# Altium PCB PD_v3.PcbDoc
Units mil, origin at the board's own origin, x right, y up, seen from the top; angles counter-clockwise.
Board outline 3519.8 x 1510 mil, 2 copper layers (Top Layer, Bottom Layer); 50 components, 35 nets, 142 pads, 321 vias.
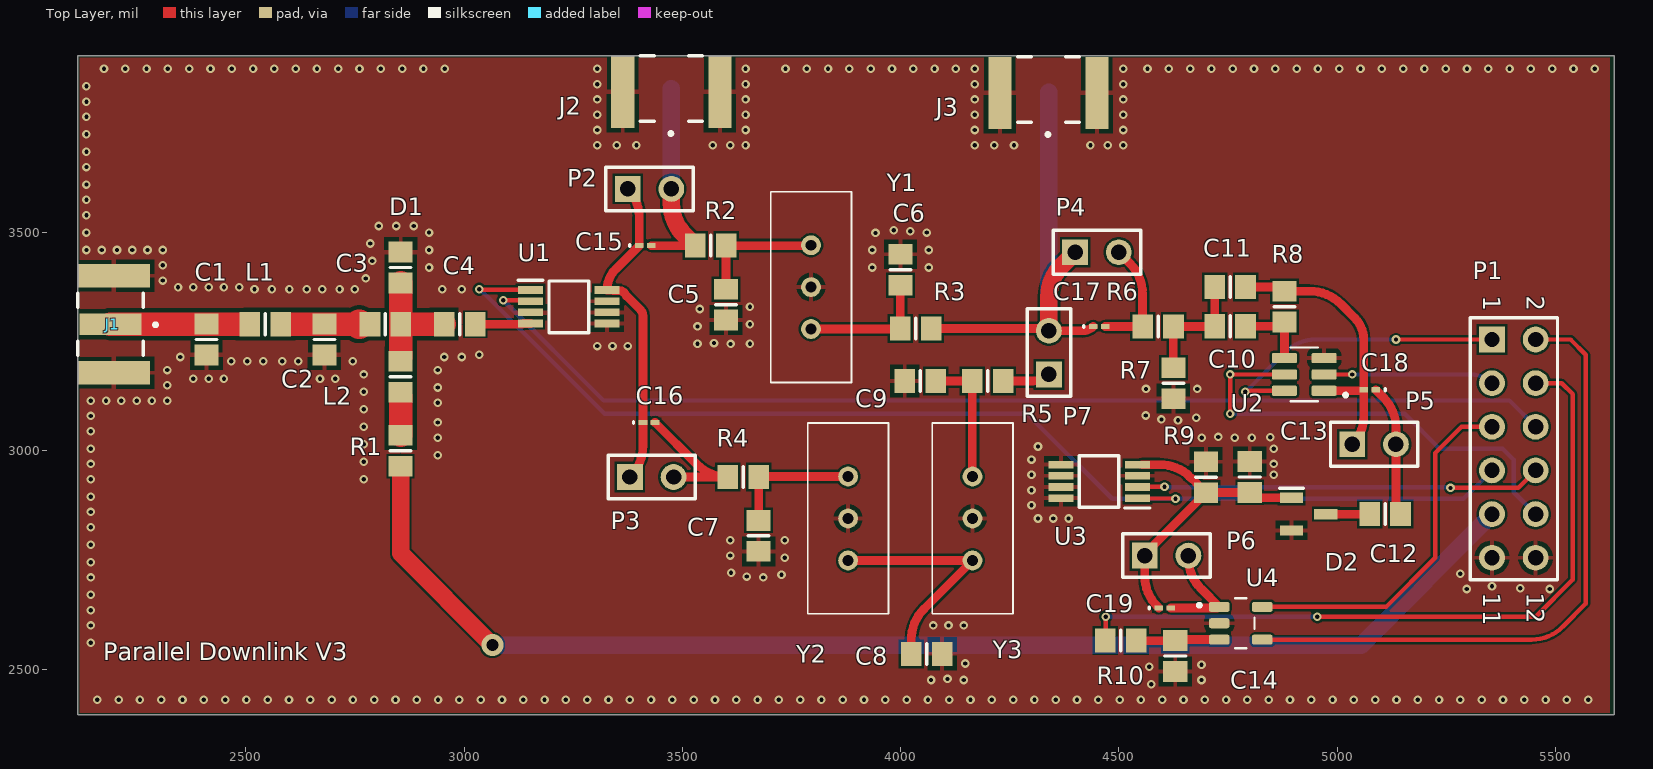
[diagram p0: Top Layer view]
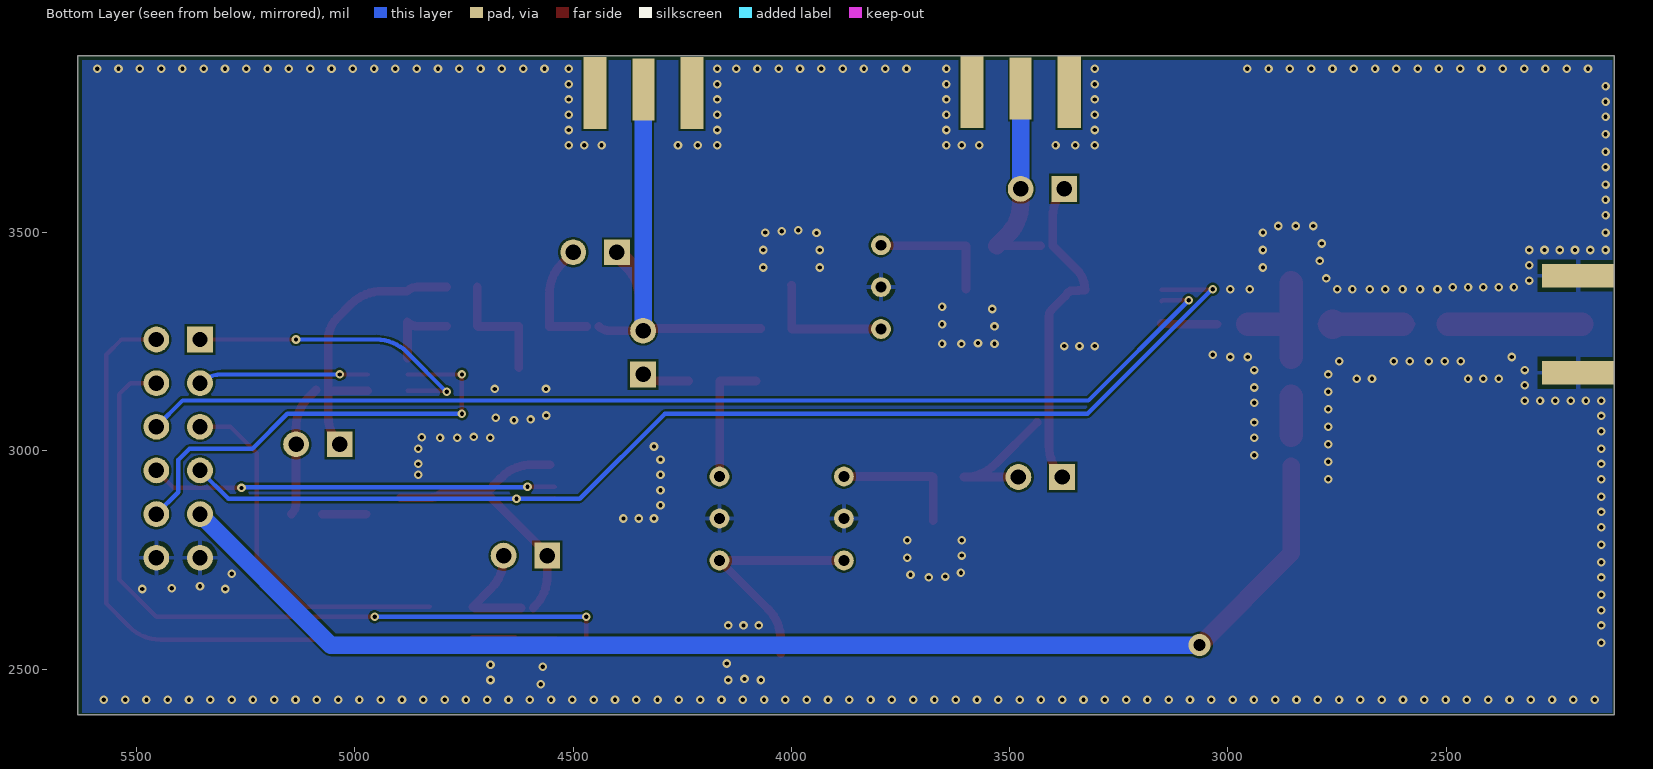
[diagram p1: Bottom Layer view, seen from below]

## Layer stack, top to bottom
Top Solder: solder mask 0.4, Solder Resist, Dk 3.5
Top Layer: signal copper 1.4
Dielectric 1: dielectric 12.6, FR-4, Dk 4.8
Bottom Layer: signal copper 1.4
Bottom Solder: solder mask 0.4, Solder Resist, Dk 3.5

## Board outline
2115.2,3486.85 2115.2,3905 5635,3905 5635,2395 2115.2,2395

## Design rules (kind name [scope] priority, off if disabled: settings)
Clearance Clearance_BD [InNetClass('BD')] p1: gap=5 ignorepadtopadclearanceinfootprint=TRUE except(0: Arc-Hole Track-Hole SMDPad-Hole THPad-Hole Via-Hole Fill-Hole Poly-Hole Region-Hole Text-Hole; 10: Arc-Fill Arc-Poly Arc-Region Track-Fill Track-Poly Track-Region SMDPad-Fill SMDPad-Poly SMDPad-Region THPad-Fill THPad-Poly THPad-Region Via-Fill Via-Poly Via-Region Fill-Fill Fill-Poly Fill-Region Poly-Poly Poly-Region Region-Region)
Clearance Clearance_1 [All] p2: gap=5 ignorepadtopadclearanceinfootprint=TRUE except(0: Arc-Hole Track-Hole SMDPad-Hole THPad-Hole Via-Hole Fill-Hole Poly-Hole Region-Hole Text-Hole)
HoleToHoleClearance [All] p1: gap=5 allowstackedmicrovias=TRUE
MinimumSolderMaskSliver [All] p1: minsoldermaskwidth=5
PolygonConnect [All] p1: thpad.connectstyle=Relief thpad.reliefconductorwidth=10 thpad.reliefentries=4 thpad.polygonreliefangle="90 Angle" thpad.airgapwidth=10 smdpad.connectstyle=Relief smdpad.reliefconductorwidth=10 smdpad.reliefentries=4 smdpad.polygonreliefangle="90 Angle" smdpad.airgapwidth=10 via.connectstyle=Direct via.reliefconductorwidth=10 via.reliefentries=4 via.polygonreliefangle="90 Angle" via.airgapwidth=10
RoutingVias [All] p1: holewidth=9.84 width=19.68 viastyle="Through Hole" minholewidth=9.84 minwidth=19.68 maxholewidth=28 maxwidth=50
SilkToSilkClearance [All] p1: silktosilkclearance=5
SilkToSolderMaskClearance [IsPad] p1: minsilkscreentomaskgap=5 clearancetoexposedcopper=TRUE
SolderMaskExpansion [All] p1: expansion=4 istentingtop=FALSE
UnRoutedNet [All] p1: checkbadconnections=TRUE
Width [All] p1: maxlimit=70 minlimit=10 preferedwidth=10 minimp=50.000000 maximp=50.000000 favimp=50.000000
25 further rules are at their usual default settings.

## Classes and differential pairs
net class BD: NetC1_2 NetC2_2 NetC3_2 NetL2_2

## Components (designator, comment, footprint, x,y, rotation, side; value= is the part's Value field where it differs from the comment)
C1 "陶瓷电容" 6-0805_N 2410,3255 r90 top value=5.6pF
C2 "陶瓷电容" 6-0805_N 2680,3255 r90 top value=4.97pF
C3 "陶瓷电容" 6-0805_N 2820,3290 r0 top value=40pF
C4 "陶瓷电容" 6-0805_N 2990,3290 r0 top value=1pF
C5 "陶瓷电容" 6-0805_N 3600,3335 r90 top value=4.97pF
C6 "陶瓷电容" 6-0805_N 4000,3415 r270 top value=4.97pF
C7 "陶瓷电容" 6-0805_N 3675,2805 r90 top value=4.97pF
C8 "陶瓷电容" 6-0805_N 4060,2535 r180 top value=4.97pF
C9 "陶瓷电容" 6-0805_N 4045,3160 r0 top value=4.97pF
C10 "陶瓷电容" 6-0805_N 4755,3285.43 r0 top value=200nF
C11 "陶瓷电容" 6-0805_N 4755,3375.43 r0 top value=200nF
C12 "陶瓷电容" 6-0805_N 5110,2855 r0 top value=200nF
C13 "陶瓷电容" 6-0805_N 4800,2940 r90 top value=200nF
C14 "陶瓷电容" 6-0805_N 4629.41,2530 r270 top value=200nF
C15 "陶瓷电容" 0603 3415,3470 r0 top value=40pF
C16 "陶瓷电容" 0603 3423.78,3065 r0 top value=40pF
C17 "陶瓷电容" 0603 4455,3285 r0 top value=40pF
C18 "陶瓷电容" 0603 5075,3140 r180 top value=40pF
C19 "陶瓷电容" 0603 4605.63,2640 r0 top value=40pF
D1 "陶瓷电容" 6-0805_N 2855,3420 r270 top
D2 "SMS7621-005LF" SOT95P237X112-3N 4935,2855 r0 top
J1 "SMA-J-P-H-ST-EM1" SAMTEC_SMA-J-P-H-ST-EM1#1 2190,3290 r270 top
J2 "SMA-J-P-H-ST-EM1" SAMTEC_SMA-J-P-H-ST-EM1#2 3475,3830 r180 top (schematic designator J1)
J3 "SMA-J-P-H-ST-EM1" SAMTEC_SMA-J-P-H-ST-EM1#2 4338.78,3827.87 r180 top (schematic designator J1)
L1 "Inductor" 6-0805_N 2545,3290 r0 top value=1.37nH
L2 "Inductor" 6-0805_N 2855,3170 r270 top value=1.0nH
P1 "Header 6X2" HDR2X6 5355,3255 r270 top
P2 "Header 2" HDR1X2 3375,3600 r0 top
P3 "Header 2" HDR1X2 3380,2940 r0 top
P4 "Header 2" HDR1X2 4400,3455 r0 top
P5 "Header 2" HDR1X2 5035,3015 r0 top
P6 "Header 2" HDR1X2 4559.41,2760 r0 top
P7 "Header 2" HDR1X2 4340,3175 r90 top
R1 "电阻" 6-0805_N 2855,3000 r90 top value=15k
R2 "电阻" 6-0805_N 3565,3470 r180 top value=15k
R3 "电阻" 6-0805_N 4035,3280 r180 top value=15k
R4 "电阻" 6-0805_N 3640,2940 r180 top value=15k
R5 "电阻" 6-0805_N 4200,3160 r180 top value=15k
R6 "电阻" 6-0805_N 4590,3285 r0 top value=15k
R7 "电阻" 6-0805_N 4625,3155 r90 top value=15k
R8 "电阻" 6-0805_N 4880,3330.43 r90 top value=15k
R9 "电阻" 6-0805_N 4700,2939.57 r270 top value=15k
R10 "电阻" 6-0805_N 4504.41,2565 r180 top value=15k
U1 "ADG901BRMZ" SOP65P490X110-8N 3240,3330 r0 top
U2 "LMH6611MK" SOT95P280X110-6N 4925,3175 r180 top
U3 "ADG901BRMZ" SOP65P490X110-8N 4455,2930 r180 top
U4 "LMV331M5" SOT95P280X145-5N 4779.41,2605 r0 top
Y1 "ECS-10.7-7.5A" ECS10775A 3795,3471.06 r270 top
Y2 "ECS-10.7-7.5A" ECS10775A 3880,2941.06 r270 top
Y3 "ECS-10.7-7.5A" ECS10775A 4165,2748.94 r90 top

## Footprints (in the part's own frame and the unit in brackets; to place one, negate y for a bottom-side part, rotate by r counter-clockwise, add the part's x,y. Pads: shape width x height; smd on the part's side, far side on the other; paste and mask are expansions set on the pad)
6-0805_N [mm] "Chip Resistor, Body 2.0x1.2mm, IPC Medium Density"
  rect 1.2x1.4 smd: 1(-0.9,0) 2(0.9,0)
  silkscreen extent 0,-0.6 0,0.6, body extent -1.07,-0.7 1.07,0.7, height 0.7
0603 [mm] "Chip Inductor, Body 0.6x0.3mm, IPC High Density"
  rect 0.5x0.3 smd: 1(-0.35,0) 2(0.35,0)
  silkscreen extent -0.9,-0.05 -0.9,0.05, body extent -0.33,-0.18 0.33,0.18, height 0.55
ECS10775A [mm]
  round 1.155 hole 0.63: 1(0,0) 2(2.44,0) 3(4.88,0)
  silkscreen extent -3.11,-2.35 7.99,2.35, body extent -3.11,-2.35 7.99,2.35, height 11.3
HDR1X2 [mm] "Connector; Header; 2 Position"
  rect 1.5x1.5 hole 0.9: 1(0,0)
  round 1.5 hole 0.9: 2(2.54,0)
  silkscreen extent -1.27,-1.27 3.81,1.27
HDR2X6 [mm] "Connector; Header; 6x2 Position"
  rect 1.5x1.5 hole 0.9: 1(0,0)
  round 1.5 hole 0.9: 2(0,2.54) 3(2.54,0) 4(2.54,2.54) 5(5.08,0) 6(5.08,2.54) 7(7.62,0) 8(7.62,2.54) 9(10.16,0) 10(10.16,2.54) 11(12.7,0) 12(12.7,2.54)
  silkscreen extent -1.27,-1.27 13.97,3.81
SAMTEC_SMA-J-P-H-ST-EM1#1 [mm]
  rect 1.27x3.6 smd: 1(0,0)
  rect 1.35x4.2 smd: 2_1(-2.825,0.2) 3_1(2.825,0.2)
  rect 1.35x4.2 smd far side: 2_2(-2.825,0.2) 3_2(2.825,0.2)
  silkscreen extent -1.8,-1.9 1.8,2.72
SAMTEC_SMA-J-P-H-ST-EM1#2 [mm]
  rect 1.27x3.6 smd far side: 1(0,0)
  rect 1.35x4.2 smd: 2_1(-2.825,0.2) 3_1(2.825,0.2)
  rect 1.35x4.2 smd far side: 2_2(-2.825,0.2) 3_2(2.825,0.2)
  silkscreen extent -1.8,-1.9 1.8,2.72
SOP65P490X110-8N [mm]
  rect 1.45x0.45 smd: 1(-2.225,0.975) 2(-2.225,0.325) 3(-2.225,-0.325) 4(-2.225,-0.975) 5(2.225,-0.975) 6(2.225,-0.325) 7(2.225,0.325) 8(2.225,0.975)
  silkscreen extent -2.95,-1.5 1.15,1.55, body extent -2.45,-1.5 2.45,1.5, height 1.1
SOT95P237X112-3N [mm]
  rect 1.35x0.6 smd: 1(-1,0.95) 2(-1,-0.95) 3(1,0)
  silkscreen extent -1.68,1.5 -0.33,1.5
SOT95P280X110-6N [mm]
  rrect25% 1.45x0.59 smd: 1(-1.155,0.95) 2(-1.155,0) 3(-1.155,-0.95) 4(1.155,-0.95) 5(1.155,0) 6(1.155,0.95)
  silkscreen extent -2.5,-1.57 0.8,1.57, body extent -1.4,-1.45 1.4,1.45, height 1.1
SOT95P280X145-5N [mm]
  rrect50% 1.21x0.59 smd: 1(-1.255,0.95) 2(-1.255,0) 3(-1.255,-0.95) 4(1.255,-0.95) 5(1.255,0.95)
  silkscreen extent -2.51,-1.45 0.8,1.45, body extent -1.4,-1.45 1.4,1.45, height 1.45

## Part data
C1 C2 C3 C4 C5 C6 C7 C8 C9 C10 C11 C12 C13 C14 C15 C16 C17 C18 C19 D1: "Capacitor (Semiconductor SIM Model)", LatestRevisionDate=29-May-2009, LatestRevisionNote="IPC-7351 Footprint Added.", PackageDescription="Chip Capacitor", PackageReference=C1206, Published=8-Jun-2000, Publisher="Altium Limited"
D2: "Schottky Diode", Manufacturer_Name=Skyworks, Mouser Part Number=873-SMS7621-005LF, Datasheet Link=http://www.skyworksinc.com/uploads/documents/Surface_Mount_Schottky_Diodes_200041AD.pdf, Height=1.12mm, Manufacturer_Part_Number=SMS7621-005LF, Mouser Price/Stock=https://www.mouser.co.uk/ProductDetail/Skyworks-Solutions-Inc/SMS7621-005LF?qs=WMHGlxXAKT%252Bjr6kEDDbbkQ%3D%3D
J1 J2 J3: "SMA Connector Jack, Female Socket 50Ohm Board Edge, End Launch Solder", Package=None, Digi-Key_Part_Number=SAM8857-ND, MF=Samtec, MP=SMA-J-P-H-ST-EM1, SnapEDA_Link=https://www.snapeda.com/parts/SMA-J-P-H-ST-EM1/Samtec%20Inc./view-part/134500/?ref=snap, Toby_UK-Purchase-URL=https://snapeda.com/shop?store=Toby+UK&id=134500
P1: "Header, 6-Pin, Dual row", LatestRevisionDate=17-Jul-2002, LatestRevisionNote="Re-released for DXP Platform.", Publisher="Altium Limited"
P2 P3 P4 P5 P6 P7: "Header, 2-Pin", LatestRevisionDate=17-Jul-2002, LatestRevisionNote="Re-released for DXP Platform.", Publisher="Altium Limited"
R1 R2 R3 R4 R5 R6 R7 R8 R9 R10: "Resistor", LatestRevisionDate=29-May-2009, LatestRevisionNote="IPC-7351 Footprint Added.", PackageDescription="Chip Resistor", PackageReference=J1-0603, Published=8-Jun-2000, Publisher="Altium Limited"
U1 U3: "RF Switch, Wideband, 40 dB Isolation at 1 GHz, CMOS 1.65 V to 2.75 V, SPST Switches, RM-8, Pb-Free, 50 Tube", Off Isolation Test Freq=1G, Supply Voltage="Single (+1.65V to +2.75V)", # Sw Functions=1, Bandwidth=4.5GHz, Code_JEDEC=MO-187-AA, ComponentLink1Description="Manufacturer URL", ComponentLink1URL=www.analog.com, ComponentLink2Description=Datasheet, ComponentLink2URL=http://www.analog.com/static/imported-files/data_sheets/ADG901_902.pdf, ComponentLink3Description="Package Specification", ComponentLink3URL=http://www.analog.com/static/imported-files/packages/PKG_PDF/MSOP%28RM%29/RM_8.pdf, Configuration=SPST/NO, DatasheetVersion=RevB, Insertion Loss (dB)=800mdB, Off Isolation=37dB, P-1dB (dBm)=17, PackageDescription="8-Lead Mini Small Outline Package [MSOP]", PackageReference=RM-8, PackageVersion=Aug-2005
U2 U4: Package=None, Availability=Unavailable, MF="{'manufacturer': u'Texas Instruments'}", Price=None
  U2: MP=LMH6611MK/NOPB
  U4: MP=LMV331M5/NOPB
Y1 Y2 Y3: "Crystal or Oscillator", Manufacturer_Name=ECS, Mouser Part Number=520-107-7.5A, Arrow Part Number=ECS-10.7-7.5A, Arrow Price/Stock=https://www.arrow.com/en/products/ecs-10.7-7.5a/ecs-international, Datasheet Link="http://www.ecsxtal.com/store/pdf/mono crystal filters.pdf", Height=11.2mm, Manufacturer_Part_Number=ECS-10.7-7.5A, Mouser Price/Stock=https://www.mouser.co.uk/ProductDetail/ECS/ECS-107-75A?qs=A5Qiz0JZgg4zSHI1UHphaA%3D%3D
L1 L2: Code_IEC=1005, Code_JEITA=0402, LatestRevisionDate=29-May-2009, LatestRevisionNote="IPC-7351 Footprint Added.", PackageDescription="Chip Inductor", PackageReference=0402-A, Published=8-Jun-2000, Publisher="Altium Limited"

## Via types
v1: diameter 19.68, hole 9.84, Top Layer to Bottom Layer, 320 vias
v2: diameter 50, hole 28, Top Layer to Bottom Layer, 1 vias

## Nets (pads, with @x,y where several pads share a name; then routed paths per layer and width w, separated by ;. In a path a pad name is that pad's centre, name@x,y a point inside that pad or via, vN(x,y) a via of type N, cw(c..) or ccw(c..) an arc to the next point about the centre after c; other vN are vias at no path point)
GND: C1.1 C2.1 C5.1 C6.1 C7.1 C8.1 C9.1 C13.2 C14.2 D1.1 D2.2 J1.2_1 J1.2_2 J1.3_1 J1.3_2 J2.2_1 J2.3_1 J3.2_1 J3.3_1 P1.11 P1.12 R7.1 R9.1 U1.3 U1.5 U1.6 U1.7 U2.3 U3.3 U3.5 U3.6 U3.7 U3.8 U4.2 Y1.2 Y2.2 Y3.2
  other v1: 2160,2430 2208.79,2430 2257.58,2430 2306.37,2430 2355.16,2430 2403.95,2430 2452.74,2430 2501.53,2430 2550.32,2430 2599.1,2430 2647.89,2430 2696.68,2430 2745.47,2430 2794.26,2430 2843.05,2430 2891.84,2430 2940.63,2430 2989.42,2430 3038.21,2430 3087,2430 3135.79,2430 3184.58,2430 3233.37,2430 3282.16,2430 3330.95,2430 3379.74,2430 3428.52,2430 3477.31,2430 3526.1,2430 3574.89,2430 3623.68,2430 3672.47,2430 3721.26,2430 3770.05,2430 3818.84,2430 3867.63,2430 3916.42,2430 3965.21,2430 4014,2430 4062.79,2430 4111.58,2430 4160.37,2430 4209.15,2430 4257.94,2430 4306.73,2430 4355.52,2430 4404.31,2430 4453.1,2430 4501.89,2430 4550.68,2430 4599.47,2430 4648.26,2430 4697.05,2430 4745.84,2430 4794.63,2430 4843.42,2430 4892.21,2430 4941,2430 4989.79,2430 5038.57,2430 5087.36,2430 5136.15,2430 5184.94,2430 5233.73,2430 5282.52,2430 5331.31,2430 5380.1,2430 5428.89,2430 5477.68,2430 5526.47,2430 5575.26,2430 4574.47,2465 4070,2475 4145,2475 4689.47,2475 4107.63,2477.45 4569.47,2505 4689.47,2510 4148.13,2512.73 2145,2560 2145,2600 4075,2600 4110,2600 4145,2600 2145,2635 2145,2670 5297.26,2683.38 5487.26,2683.38 5420,2685 5355,2690 2145,2710 3685.61,2709.91 3647.73,2711.87 3727.42,2715.79 5282.26,2718.38 3611.8,2721.02 2145,2745 3735,2755 3610,2760 2145,2785 3610,2795 3735,2795 2145,2825 4315,2845 4350,2845 4385,2845 2145,2860 4300,2875 2145,2895 4300,2910 2145,2935 2770,2935 4300,2945 4855,2945 2145,2970 4855,2970 2770,2975 4300,2980 2940,2990 2145,3005 4855,3005 4315,3010 2770,3015 2940,3030 4690,3030 4765.61,3029.91 4805,3030 4846.8,3031.02 4727.73,3031.87 2145,3045 2770,3055 2940,3065 4635.61,3069.91 4597.73,3071.87 4677.42,3075.79 2145,3080 4561.8,3081.02 2770,3095 2940,3110 2145,3115 2180,3115 2215,3115 2250,3115 2285,3115 2320,3115 2770,3135 4562.45,3141.77 4680.03,3141.77 2940,3145 2320,3150 2380,3165 2415,3165 2450,3165 2670,3165 2705,3165 2770,3175 2320,3185 2940,3185 2466.67,3205 2503.33,3205 2540,3205 2583.33,3205 2620,3205 2745,3205 2350,3215 2955,3215 2995,3215 3035,3220 3305.21,3240 3340.21,3240 3375.21,3240 3535,3245 3610.61,3244.91 3655,3245 3572.73,3246.87 3535,3285 3655,3290 3540,3325 3655,3330 2520,3370 2560,3370 2600,3370 2640,3370 2675,3370 2715,3370 2750,3370 2950,3370 2995,3370 2345,3375 2380,3375 2415,3375 2450,3375 2485,3375 2310,3390 2775,3395 2920,3420 3935,3420 4065,3420 2310,3425 2790,3435 2135,3460 2170,3460 2205,3460 2240,3460 2275,3460 2310,3460 2920,3460 3935,3460 4065,3460 2785,3475 3942.58,3499.21 2135,3500 2920,3500 4060,3500 4022.27,3503.13 3984.39,3505.09 2805,3515 2845,3515 2885,3515 2135,3540 2135,3575 2135,3610 2135,3650 2135,3685 3305,3700 3350,3700 3395,3700 3570,3700 3610,3700 3645,3700 4170,3700 4215,3700 4260,3700 4435,3700 4475,3700 4510,3700 2135,3725 3305,3735 3645,3735 4170,3735 4510,3735 2135,3765 3305,3770 3645,3770 4170,3770 4510,3770 2135,3800 3305,3805 3645,3805 4170,3805 4510,3805 2135,3835 3305,3840 3645,3840 4170,3840 4510,3840 2175.21,3875 2224,3875 2272.79,3875 2321.58,3875 2370.37,3875 2419.16,3875 2467.95,3875 2516.74,3875 2565.53,3875 2614.32,3875 2663.11,3875 2711.9,3875 2760.69,3875 2809.48,3875 2858.27,3875 2907.06,3875 2955.85,3875 3305,3875 3645,3875 3736.48,3875 3785.26,3875 3834.05,3875 3882.84,3875 3931.63,3875 3980.42,3875 4029.21,3875 4078,3875 4126.79,3875 4170,3875 4510,3875 4565.9,3875 4614.68,3875 4663.47,3875 4712.26,3875 4761.05,3875 4809.84,3875 4858.63,3875 4907.42,3875 4956.21,3875 5005,3875 5053.79,3875 5102.58,3875 5151.37,3875 5200.16,3875 5248.95,3875 5297.74,3875 5346.53,3875 5395.32,3875 5444.1,3875 5492.89,3875 5541.68,3875 5590.47,3875
NetC1_2: C1.2 J1.1 L1.1 | length 319.9
  Top Layer w10: C1.2@2409.57,3290 C1.2
  Top Layer w20: C1.2 C1.2@2410.22,3290.22 ; L1.1@2495,3290 L1.1
  Top Layer w54.08: J1.1 C1.2@2409.57,3290 ; C1.2@2410.22,3290.22 2494.78,3290.22 L1.1@2495,3290
NetC2_2: C2.2 C3.1 L1.2 | length 204.5
  Top Layer w20: L1.2 L1.2@2600,3290 ; C2.2@2679.78,3290.22 C2.2 C2.2@2680.22,3290.22 ; 2760,3290 C3.1
  Top Layer w54.08: L1.2@2600,3290 2600.22,3290.22 C2.2@2679.78,3290.22 ; C2.2@2680.22,3290.22 2759.78,3290.22
  Top Layer w67.18: 2759.78,3290.22 2760,3290
NetC3_2: C3.2 C4.1 D1.2 L2.1 | length 269.6
  Top Layer w20: L2.1 L2.1@2855.22,3205.65 ; D1.2 D1.2@2855.22,3384.35 ; C3.2@2855.22,3290.22 C3.2
  Top Layer w54.08: C3.2@2855.22,3290.22 D1.2@2855.22,3384.35 ; L2.1@2855.43,3214.57 C3.2 C4.1
NetC4_2: C4.2 U1.4 | length 127.6
  Top Layer w20: C4.2 3133.39,3290 3135,3291.61 U1.4
NetC5_2: C5.2 R2.1 Y1.1 | length 294.5
  Top Layer w20: C5.2 ccw(c3598.95,3371.48) 3600.43,3371.48 R2.1 3792.43,3470 ccw(c3792.43,3473.63) Y1.1
NetC6_2: C6.2 R3.2 Y1.3 | length 304.5
  Top Layer w20: Y1.3 3997,3278.94 ccw(c3997,3282.57) R3.2 3999.57,3378.52 cw(c4001.05,3378.52) C6.2
NetC7_2: C7.2 R4.1 Y2.1 | length 304.5
  Top Layer w20: C7.2 3675,2938.95 cw(c3676.48,2938.95) R4.1 cw(c3678,2937.43) 3678,2941.06 Y2.1
NetC8_2: C8.2 Y2.3 Y3.1 | length 552.8
  Top Layer w20: Y2.3 Y3.1 4053.86,2637.79 ccw(c4124.57,2567.08) 4024.57,2567.08 C8.2
NetC9_2: C9.2 R5.2 Y3.3 | length 303.2
  Top Layer w20: C9.2 R5.2 4164.57,2942.11 ccw(c4166.05,2942.11) Y3.3
NetC10_1: C10.1 C11.1 R6.2 R7.2 | length 278.9
  Top Layer w20: R7.2 4625,3283.95 cw(c4626.48,3283.95) R6.2 4718.52,3285 ccw(c4718.52,3286.48) C10.1 C11.1
NetC10_2: C10.2 R8.1 U2.4 | length 174.8
  Top Layer w20: C10.2 4856.9,3285.43 ccw(c4856.9,3318.1) R8.1 ccw(c4881.14,3293.86) 4879.53,3293.86 U2.4
NetC11_2: C11.2 C18.2 P5.1 R8.2 U2.1 | length 667.1
  Top Layer w20: C11.2 4856.9,3375.43 cw(c4856.9,3342.77) R8.2 4937.71,3365.87 cw(c4937.71,3265.87) 5008.42,3336.58 5040,3305 cw(c4988.77,3253.77) 5061.22,3253.77 C18.2 ; U2.1 5055.42,3137.6 ccw(c5055.42,3145.8) C18.2 ; P5.1 ccw(c4971.7,3078.3) 5061.22,3078.3 C18.2
NetC12_1: C12.1 D2.3 | length 100.2
  Top Layer w20: D2.3 C12.1
NetC12_2: C12.2 C18.1 P5.2 | length 302.6
  Top Layer w20: C18.1 5105.71,3123.07 cw(c5035,3052.36) 5135,3052.36 P5.2 5135,2880.19 ccw(c5170.62,2880.19) C12.2
NetC13_1: C13.1 C19.1 D2.1 P6.1 R9.2 U3.4 | length 700.9
  Top Layer w20: U3.4@4552.6,2968.39 4594.33,2968.39 cw(c4594.33,2868.39) 4656.23,2946.92 cw(c4643.81,2931.25) 4660.15,2942.78 ccw(c4672.44,2951.38) 4664.76,2938.49 cw(c4654.56,2921.29) 4668.74,2935.39 4683.5,2920.63 4683.5,2917.76 R9.2 ; C19.1 4588.7,2643.15 cw(c4659.41,2713.86) 4559.41,2713.86 P6.1 cw(c4567.96,2760) 4561.91,2766.04 R9.2 ; D2.1 4829.37,2892.4 cw(c4829.37,2933.94) C13.1 4701.05,2904.57 ccw(c4701.05,2903.09) R9.2
NetC14_1: C14.1 R10.1 U4.3 | length 190.9
  Top Layer w20: R10.1 4628.36,2565 ccw(c4628.36,2573.87) 4634.64,2567.6 U4.3
NetC15_1: C15.1 C16.1 P2.1 P3.1 U1.8 | length 753.7
  Top Layer w20: P2.1 cw(c3311.7,3536.7) 3401.22,3536.7 C15.1 3347.39,3416.17 ccw(c3395.18,3368.39) U1.8 3334.75,3368.39 cw(c3334.75,3339.75) 3342.38,3367.35 ccw(c3347.62,3386.65) 3347.56,3366.65 3356.14,3366.65 cw(c3356.14,3351.65) 3369.27,3358.91 ccw(c3386.71,3368.71) 3372.5,3354.63 3404.18,3322.95 cw(c3390,3308.84) 3410,3308.84 C16.1 3410,3011.42 cw(c3310,3011.42) 3380.71,2940.71 P3.1
NetC15_2: C15.2 J2.1 P2.2 R2.2 | length 479.1
  Top Layer w20: C15.2 R2.2
  Top Layer w40: P2.2 3475,3565.99 ccw(c3575,3565.99) 3504.29,3495.28 R2.2
  Bottom Layer w40: P2.2 J2.1
NetC16_2: C16.2 P3.2 R4.2 | length 338.3
  Top Layer w20: C16.2 3533.27,2969.29 ccw(c3603.98,3040) R4.2@3603.84,2940 ; P3.2 R4.2@3603.84,2940 ; R4.2 R4.2@3603.84,2940
NetC17_1: C17.1 J3.1 P4.1 P7.2 R3.1 | length 1130.8
  Top Layer w20: R3.1 4327.93,3280 cw(c4327.93,3262.93) P7.2 4417.08,3275 ccw(c4417.08,3309.14) C17.1
  Top Layer w40: P7.2 4340,3353.58 cw(c4440,3353.58) 4369.29,3424.29 P4.1
  Bottom Layer w10: J3.1@4333.78,3827.87 J3.1@4340,3821.65
  Bottom Layer w40: P7.2 J3.1@4340,3821.65
NetC17_2: C17.2 P4.2 R6.1 | length 274.1
  Top Layer w20: C17.2 R6.1 4554.57,3359.01 ccw(c4454.57,3359.01) 4525.28,3429.72 P4.2
NetC19_2: C19.2 P6.2 U4.1 | length 253.8
  Top Layer w20: C19.2 4724.2,2640 ccw(c4724.2,2648.2) U4.1 4688.7,2683.7 cw(c4759.41,2754.41) 4659.41,2754.41 P6.2
NetL2_2: L2.2 R1.2 | length 89.1
  Top Layer w54.08: R1.2 L2.2@2855,3124.57
NetP1_1: P1.1 U2.6 | length 700.6
  Top Layer w10: v1(4790,3135) cw(c4796.27,3128.73) 4796.27,3137.6 U2.6 ; v1(5135,3255) P1.1
  Bottom Layer w10: v1(4790,3135) 4880.71,3225.71 cw(c4951.42,3155) 4951.42,3255 v1(5135,3255)
NetP1_2: P1.2 U4.4 | length 1470.5
  Top Layer w10: U4.4 5446.18,2567.6 ccw(c5446.18,2667.6) 5516.89,2596.89 5570,2650 5570,3220 5535,3255 P1.2
NetP1_3: P1.3 U2.2 | length 389.9
  Top Layer w10: U2.2 v1(5035,3175)
  Bottom Layer w10: v1(5035,3175) 5306.72,3175 cw(c5306.72,3106.72) P1.3
NetP1_4: P1.4 R10.2 | length 1681
  Top Layer w10: R10.2 4470,2566.02 v1(4470,2620) ; v1(4955,2620) 5455,2620 5540,2705 5540,3130 5515,3155 P1.4
  Bottom Layer w10: v1(4470,2620) v1(4955,2620)
NetP1_5: P1.5 U4.5 | length 837.7
  Top Layer w10: U4.5 5112.4,2642.4 5225,2755 5225,2995 5285,3055 P1.5
NetP1_6: P1.6 U1.2 | length 2548.1
  Top Layer w10: v1(3090,3345) 3147.08,3345 cw(c3147.08,3337.47) U1.2
  Bottom Layer w10: v1(3090,3345) 3319.84,3115.16 5394.84,3115.16 P1.6
NetP1_7: P1.7 U1.1 U3.1 | length 2751.9
  Top Layer w10: v1(3035,3370) 3035.81,3369.19 3151.59,3369.19 U1.1 ; U3.1 4543.41,2890.81 4629.19,2890.81 v1(4630,2890)
  Bottom Layer w10: v1(3035,3370) 3036.94,3370 3321.94,3085 4290,3085 4485,2890 5290,2890 P1.7
NetP1_8: P1.8 U3.2 | length 930.5
  Top Layer w10: U3.2 4542.97,2917.58 4604.47,2917.58 v1(4604.84,2917.95) ; v1(5260,2915) 5415,2915 P1.8
  Bottom Layer w10: v1(4604.84,2917.95) 4606.32,2916.48 5258.52,2916.48 v1(5260,2915)
NetP1_9: P1.9 R1.1 | length 2910.8
  Top Layer w40: R1.1 2855,2765 v2(3065,2555)
  Bottom Layer w40: v2(3065,2555) 5055,2555 P1.9
NetP1_10: P1.10 U2.5 | length 1053.2
  Top Layer w10: v1(4755,3085) v1(4755,3175) U2.5
  Bottom Layer w10: v1(4755,3085) 5155,3085 5235,3005 5379.14,3005 5405,2979.14 5405,2905 P1.10
NetP7_1: P7.1 R5.1 | length 108.6
  Top Layer w20: R5.1 4303.79,3160 ccw(c4303.79,3211.21) P7.1
pads on no net: J2.2_2 J2.3_2 J3.2_2 J3.3_2

## Polygon pours and split planes (outlines as drawn)
GND on Top Layer "GND_L01_P000" (solid, pour order 0): 2120,3900 2120,2400 5625,2400 5625,3900
GND on Bottom Layer "GND_L02_P001" (solid, pour order 1): 2120,3895 2120,2400 5625,2400 5625,3895

## Silkscreen, mask and mechanical layers (free items; w line width, h text height)
Top Overlay:
  text "Parallel Downlink V3" at 2173.45,2520.01 h40
Mechanical 13:
  the board outline again, w10

## Text inside footprints (layer, text, board x,y; h text height)
J1: Mechanical 13 "PCB EDGE" at 2123.01,3120.55 h40 r270
J2: Mechanical 13 "PCB EDGE" at 2995,3835 h40
J3: Mechanical 13 "PCB EDGE" at 3738.78,3757.87 h40
P1: Top Overlay "12" at 5435,2675 h40 r270; Top Overlay "1" at 5335,2635 h40 r270; Top Overlay "1" at 5335,2675 h40 r270; Top Overlay "1" at 5335,3355 h40 r270; Top Overlay "2" at 5435,3355 h40 r270